# Altium PCB sdc_prech_pcb.PcbDoc
Units mm, origin at the board's own origin, x right, y up, seen from the top; angles counter-clockwise.
Board outline 80 x 80 mm, 2 copper layers (Top Layer, Bottom Layer); 50 components, 36 nets, 153 pads, 18 vias.
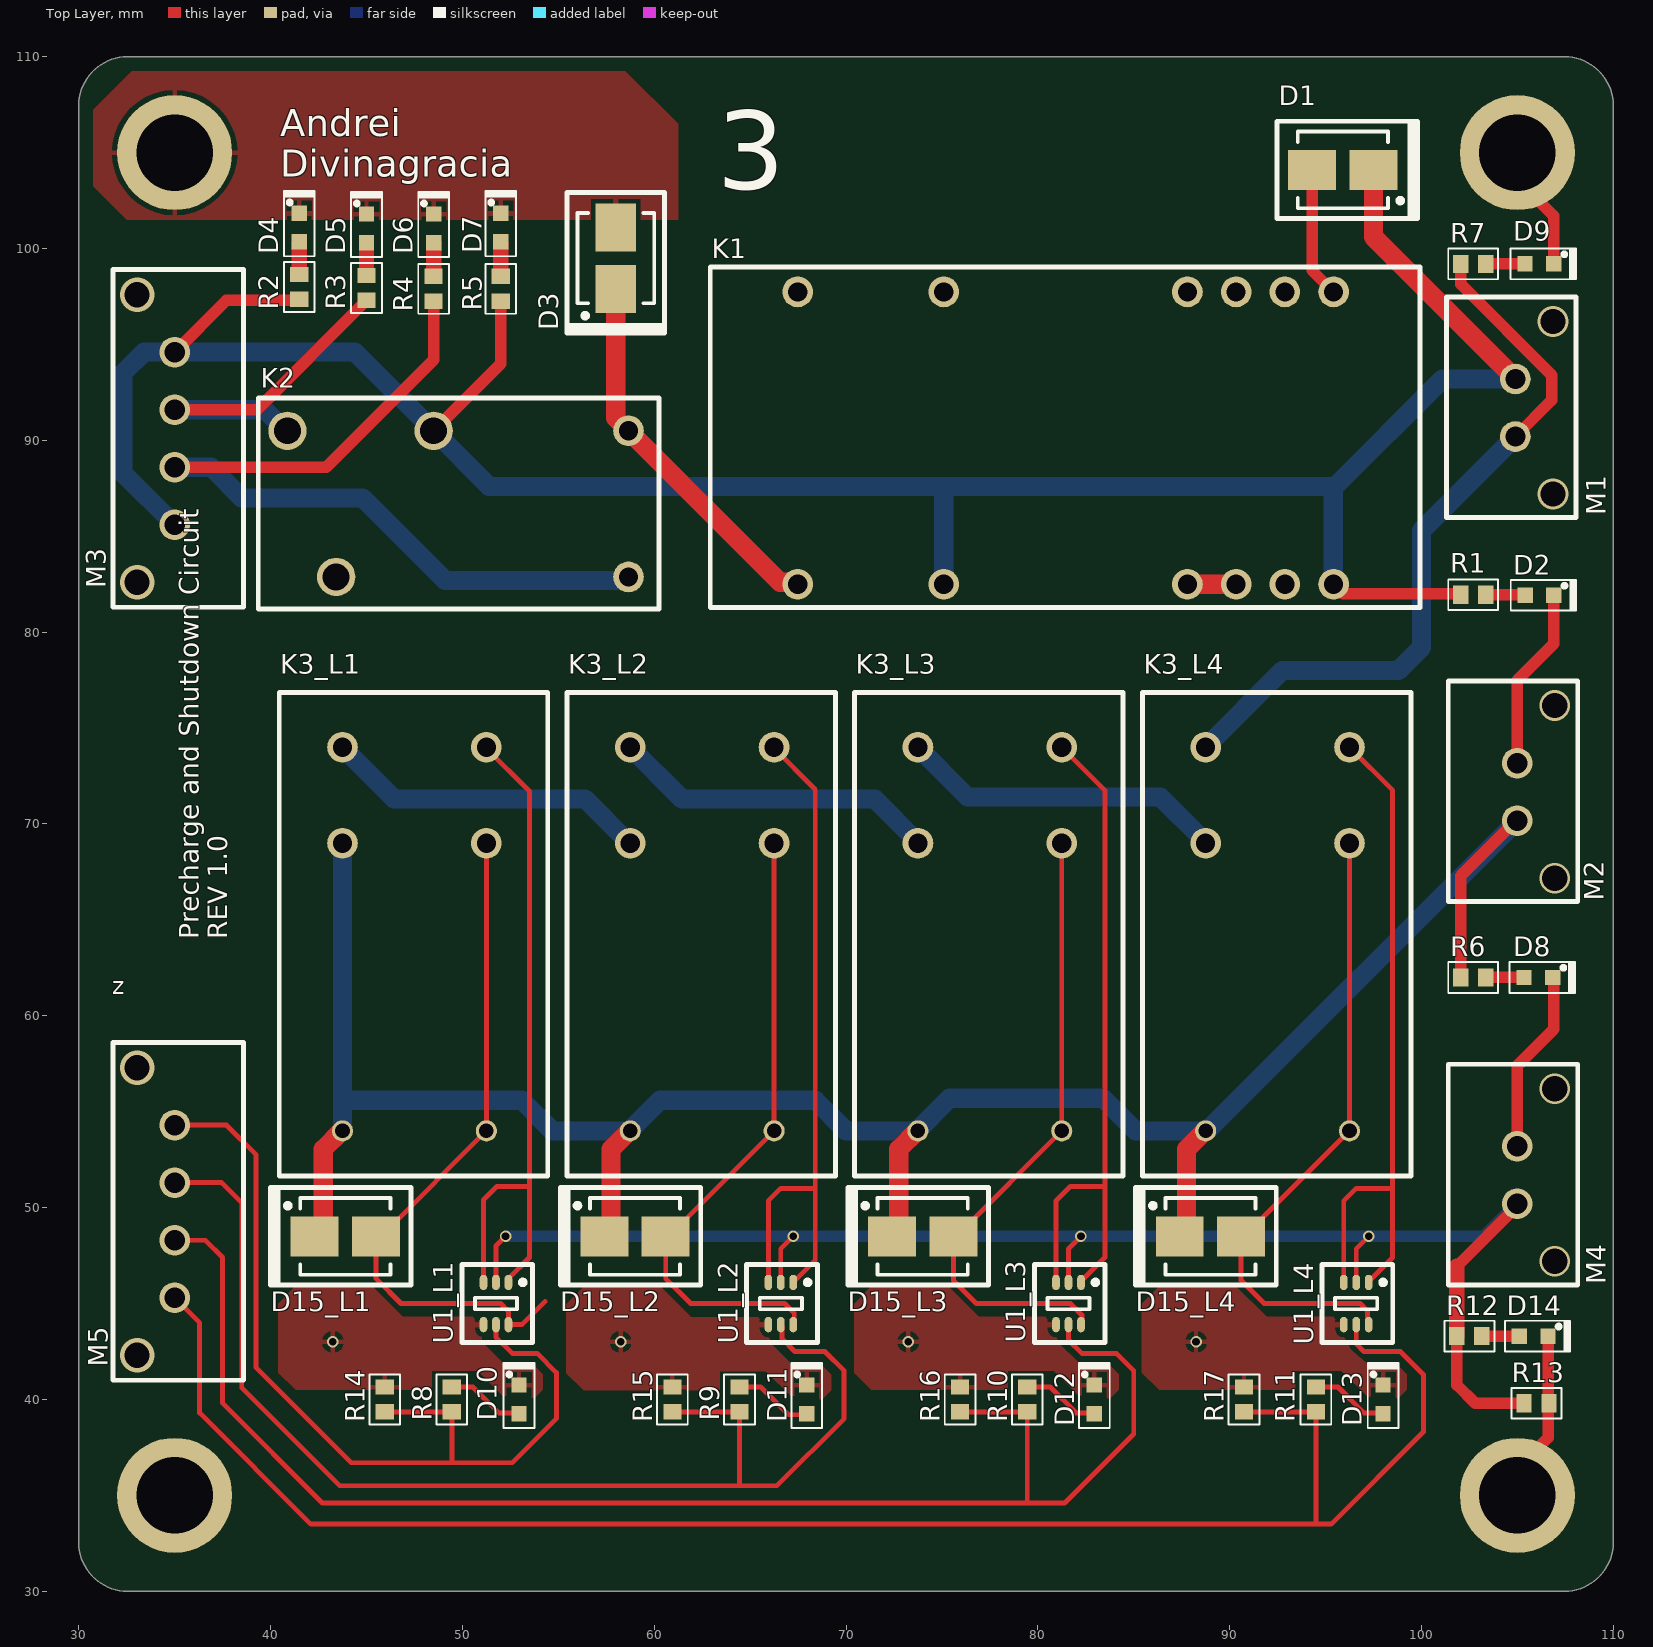
[diagram p0: Top Layer view]
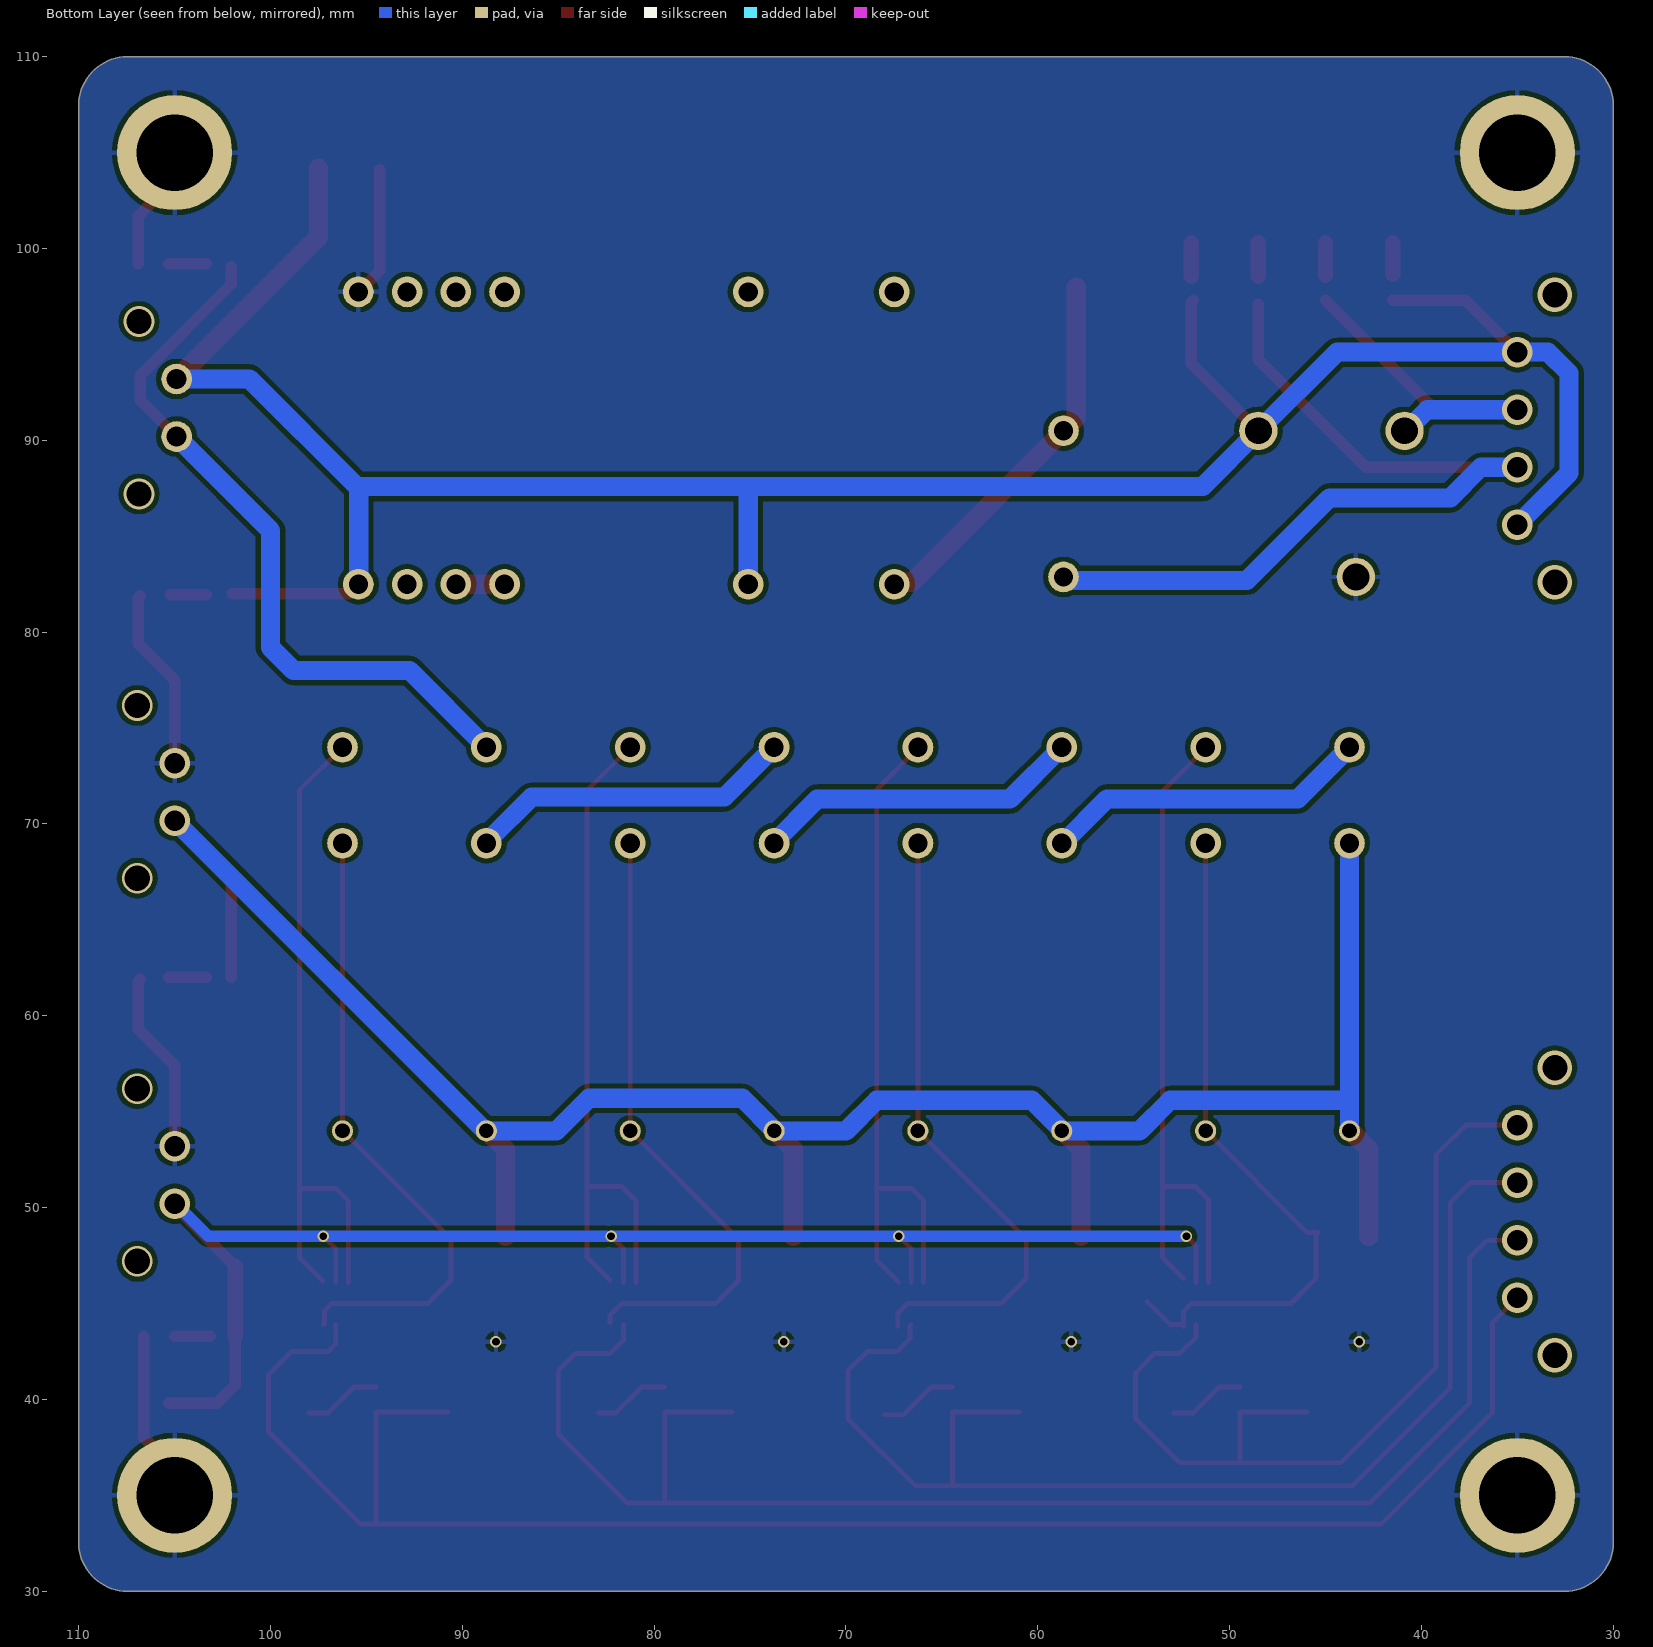
[diagram p1: Bottom Layer view, seen from below]
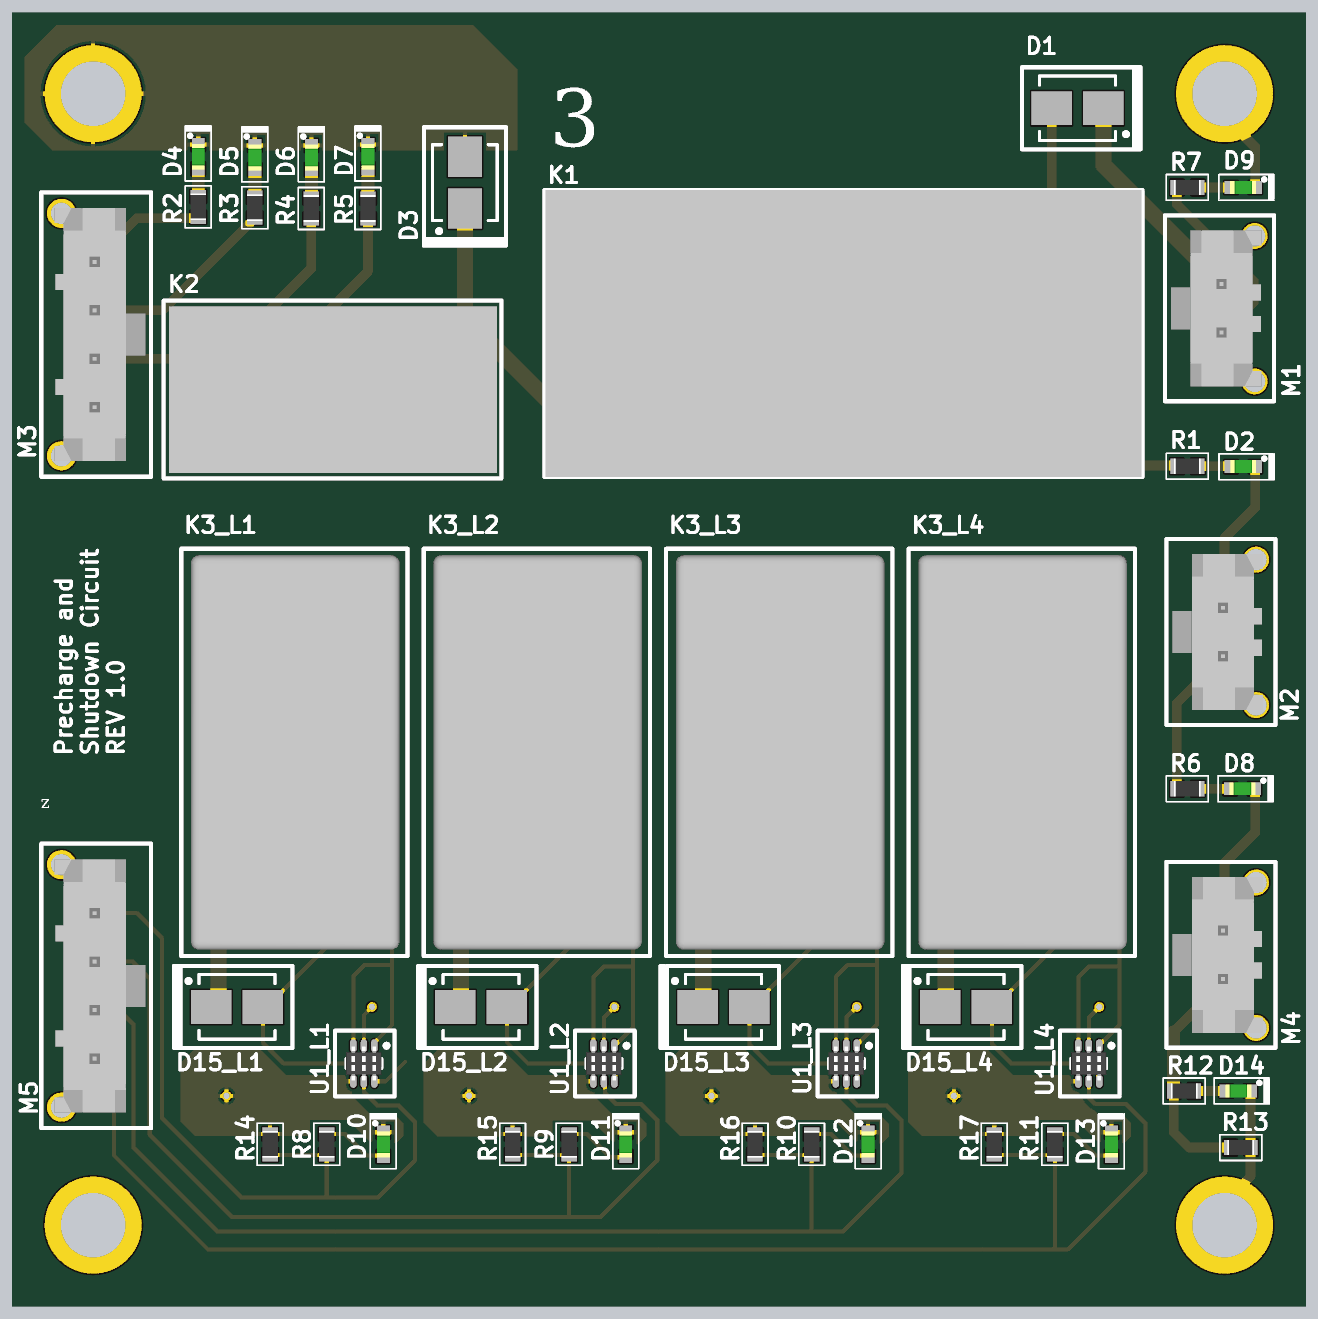
[diagram p2: 3D render of the assembled board from above, using the file's embedded part models]

## Layer stack, top to bottom
Top Solder: solder mask 0.0102, Solder Resist, Dk 3.5
Top Layer: signal copper 0.0356
Dielectric 1: dielectric 0.32, FR-4, Dk 4.8
Bottom Layer: signal copper 0.0356
Bottom Solder: solder mask 0.0102, Solder Resist, Dk 3.5

## Board outline
32.54,30 cw(c32.54,32.54) 30,32.54 30,107.46 cw(c32.54,107.46) 32.54,110 107.46,110 cw(c107.46,107.46) 110,107.46 110,32.54 cw(c107.46,32.54) 107.46,30

## Design rules (kind name [scope] priority, off if disabled: settings)
Clearance [All] p1: gap=0.254 ignorepadtopadclearanceinfootprint=TRUE except(0: Arc-Hole Track-Hole SMDPad-Hole THPad-Hole Via-Hole Fill-Hole Poly-Hole Region-Hole Text-Hole)
PolygonConnect [All] p1: connectstyle=Relief reliefconductorwidth=0.254 reliefentries=4 polygonreliefangle="90 Angle" airgapwidth=0.254
RoutingVias [All] p1: holewidth=0.711 width=1.27 viastyle="Through Hole" minholewidth=0.711 minwidth=1.27 maxholewidth=0.711 maxwidth=1.27
SolderMaskExpansion [All] p1: expansion=0.102
Width [All] p1: maxlimit=1 minlimit=0.1 preferedwidth=0.254 minimp=50.000000 maximp=50.000000 favimp=50.000000
30 further rules are at their usual default settings.

## Classes and differential pairs
channel class Latch: L1 L2 L3 L4
component class U_shutdown_circuit: D8 D9 D10 D11 D12 D13 D14 M4 M5 R6 R7 R8 R9 R10 R11 R12 R13 R14 R15 R16 R17
component class U_precharge_circuit: D1 D2 D3 K1 K2 R1
component class sdc_prech_top_sheet: D4 D5 D6 D7 M1 M2 M3 R2 R3 R4 R5
component class L4: D15_L4 K3_L4 U1_L4
component class L3: D15_L3 K3_L3 U1_L3
component class L2: D15_L2 K3_L2 U1_L2
component class L1: D15_L1 K3_L1 U1_L1

## Components (designator, comment, footprint, x,y, rotation, side; value= is the part's Value field where it differs from the comment)
D1 "SD560BTR" DIODE 95.9,104.1 r180 top
D2 "BLUE" "LED 0603" 106.157,81.925 r0 top
D3 "SD560BTR" DIODE 58,99.5 r90 top
D4 "BLUE" "LED 0603" 41.5,101.1 r90 top
D5 "BLUE" "LED 0603" 45,101.05 r90 top
D6 "BLUE" "LED 0603" 48.5,101.05 r90 top
D7 "BLUE" "LED 0603" 52,101.1 r90 top
D8 "BLUE" "LED 0603" 106.1,62 r0 top
D9 "BLUE" "LED 0603" 106.15,99.2 r0 top
D10 "YELLOW" "LED 0603" 52.95,40 r90 top
D11 "YELLOW" "LED 0603" 67.95,40 r90 top
D12 "YELLOW" "LED 0603" 82.95,40 r90 top
D13 "YELLOW" "LED 0603" 98,40 r90 top
D14 "YELLOW" "LED 0603" 105.85,43.3 r0 top
D15_L1 "SD560BTR" DIODE 43.9,48.5 r0 top (schematic designator D15)
D15_L2 "SD560BTR" DIODE 59,48.5 r0 top (schematic designator D15)
D15_L3 "SD560BTR" DIODE 74,48.5 r0 top (schematic designator D15)
D15_L4 "SD560BTR" DIODE 89,48.5 r0 top (schematic designator D15)
K1 "Time Delay Relay" "RELAY TIMED" 99.87,99.04 r180 top
K2 "G5Q-14-DC12" "RELAY SPDT PRECHARGE" 58.66,90.5 r180 top
K3_L1 "5-1419124-6" "RELAY DPST SDC" 53.95,52.05 r90 top (schematic designator K3)
K3_L2 "5-1419124-6" "RELAY DPST SDC" 68.95,52.05 r90 top (schematic designator K3)
K3_L3 "5-1419124-6" "RELAY DPST SDC" 83.95,52.05 r90 top (schematic designator K3)
K3_L4 "5-1419124-6" "RELAY DPST SDC" 98.95,52.05 r90 top (schematic designator K3)
M1 "0436500228" "2-PIN MOLEX" 104.81,91.725 r90 top
M2 "0436500228" "2-PIN MOLEX" 104.9,71.7 r90 top
M3 "0436500428" "4-PIN MOLEX" 35.09,90.1 r270 top
M4 "0436500228" "2-PIN MOLEX" 104.9,51.725 r90 top
M5 "0436500428" "4-PIN MOLEX" 35.09,49.8 r270 top
R1 "1KΩ" "RESISTOR CRCW0603" 102.7,81.95 r0 top
R2 "1KΩ" "RESISTOR CRCW0603" 41.5,98 r90 top
R3 "1KΩ" "RESISTOR CRCW0603" 45,97.95 r90 top
R4 "1KΩ" "RESISTOR CRCW0603" 48.5,97.9 r90 top
R5 "1KΩ" "RESISTOR CRCW0603" 52,97.9 r90 top
R6 "1KΩ" "RESISTOR CRCW0603" 102.7,62 r0 top
R7 "1KΩ" "RESISTOR CRCW0603" 102.7,99.2 r0 top
R8 "1KΩ" "RESISTOR CRCW0603" 49.45,40 r90 top
R9 "1KΩ" "RESISTOR CRCW0603" 64.45,40 r90 top
R10 "1KΩ" "RESISTOR CRCW0603" 79.45,40 r90 top
R11 "1KΩ" "RESISTOR CRCW0603" 94.5,40 r90 top
R12 "1KΩ" "RESISTOR CRCW0603" 102.5,43.3 r0 top
R13 "10KΩ" "RESISTOR CRCW0603" 106,39.8 r0 top
R14 "10KΩ" "RESISTOR CRCW0603" 45.95,40 r90 top
R15 "10KΩ" "RESISTOR CRCW0603" 60.95,40 r90 top
R16 "10KΩ" "RESISTOR CRCW0603" 75.95,40 r90 top
R17 "10KΩ" "RESISTOR CRCW0603" 90.75,40 r90 top
U1_L1 "SSM6N7002CFU,LF" "N-MOSFET (2 FETS)" 51.75,45 r270 top (schematic designator U1)
U1_L2 "SSM6N7002CFU,LF" "N-MOSFET (2 FETS)" 66.6,45 r270 top (schematic designator U1)
U1_L3 "SSM6N7002CFU,LF" "N-MOSFET (2 FETS)" 81.6,45 r270 top (schematic designator U1)
U1_L4 "SSM6N7002CFU,LF" "N-MOSFET (2 FETS)" 96.6,45 r270 top (schematic designator U1)

## Footprints (in the part's own frame and the unit in brackets; to place one, negate y for a bottom-side part, rotate by r counter-clockwise, add the part's x,y. Pads: shape width x height; smd on the part's side, far side on the other; paste and mask are expansions set on the pad)
"2-PIN MOLEX" [mm]
  round 1.6 hole 1.06: 1(-1.525,-0.09) 2(1.475,-0.09)
  silkscreen extent -5.75,-3.25 5.75,3.5, body extent -4.82,-2.47 4.83,3.14, height 9.95
"4-PIN MOLEX" [mm]
  round 1.6 hole 1.06: 1(-4.5,-0.09) 2(-1.5,-0.09) 3(1.5,-0.09) 4(4.5,-0.09)
  silkscreen extent -8.8,-3.3 8.8,3.5, body extent -7.82,-2.47 7.83,3.14, height 9.95
DIODE [mm] "Molded Diode, 2-Leads, Body 4.38x3.62mm, IPC Medium Density"
  rect 2.5x2.1 smd: 1(1.6,0) 2(-1.6,0)
  silkscreen extent -3.9,-2.54 3.43,2.54, body extent -2.35,-1.97 2.35,1.97, height 2.6
"LED 0603" [mm]
  rect 0.8x0.8 smd: 1(-0.75,0) 2(0.75,0)
  silkscreen extent -1.5,-0.8 1.9,0.8, body extent -0.8,-0.4 0.8,0.4, height 0.39
"N-MOSFET (2 FETS)" [mm] "TSOP, 6-Leads, Body 2.00x1.25mm, Pitch 0.65mm, IPC Medium Density"
  oval 0.8x0.4 smd: 1(-1.1,0.65) 2(-1.1,0) 3(-1.1,-0.65) 4(1.1,-0.65) 5(1.1,0) 6(1.1,0.65)
  silkscreen extent -2.03,-1.78 2.03,1.91, body extent -1.05,-1.1 1.05,1.1, height 1.1
"RELAY DPST SDC" [mm]
  round 1.1 hole 0.762: 1(1.95,2.7) 6(1.95,10.2)
  round 1.6 hole 1: 2(16.95,2.7) 3(21.95,2.7) 4(21.95,10.2) 5(16.95,10.2)
  silkscreen extent -0.4,-0.5 24.8,13.5, body extent 0,0 24.4,12.9, height 24.51
"RELAY SPDT PRECHARGE" [mm]
  round 1.6 hole 1: 1(0,0) 3(0,7.62)
  round 2 hole 1.4: 2(10.16,0) 4(17.78,0) 5(15.24,7.62)
  silkscreen extent -1.6,-1.7 19.3,9.3, body extent -1.33,-1.34 18.97,8.96, height 15.81
"RELAY TIMED" [mm]
  round 1.6 hole 1: 1(4.45,1.3) 2(6.99,1.3) 3(9.53,1.3) 4(12.07,1.3) 9(24.77,1.3) 12(32.39,1.3) 13(32.39,16.54) 15(24.77,16.54) 21(12.07,16.54) 22(9.53,16.54) 23(6.99,16.54) 24(4.45,16.54)
  silkscreen extent -0.05,0 36.95,17.75, body extent 0,0 36.9,17.75, height 20.5
"RESISTOR CRCW0603" [mm] "Chip Resistor, 2-Leads, Body 1.58x0.85mm, IPC Medium Density"
  rect 0.8x0.95 smd: 1(-0.65,0) 2(0.65,0)
  silkscreen extent -1.3,-0.8 1.3,0.8, body extent -0.82,-0.48 0.82,0.48, height 0.5

## Part data
D1 D3 D15_L1 D15_L2 D15_L3 D15_L4: "DIODE GEN PURP 600V 5A SMB", Average Rectified Current=5A, Case/Package=SMB, Manufacturer=SMC, Max Reverse Voltage (DC)=600V, Supplier Part Number 1=1655-1530-6-ND, Category="Discrete Semiconductor Products", ComponentLink1Description=http://www.smc-diodes.com/propdf/SD560B%20N1412%20REV.D.pdf?src-supplier=Digi-Key, ComponentLink1URL=http://www.smc-diodes.com/propdf/SD560B%20N1412%20REV.D.pdf?src-supplier=Digi-Key, Manufacturer Part Number=SD560BTR, Mount="Surface Mount", Packaging="Tape and Reel", Pricing 1="1=0.42, 10=0.309, 100=0.1468, 500=0.11978, 1000=0.08887 (USD)", Stock 1=90144, Supplier 1=Digi-Key
D2 D4 D5 D6 D7 D8 D9: library part LTST-C191TBKT-5A, "LED BLUE CLEAR CHIP SMD", Case/Package=0603, Case Code (Metric)=1608, Color=Blue, Forward Current=20mA, Forward Voltage=2.8V, Lens Color=Colorless, Manufacturer="Vishay Lite-On", Max Operating Temperature=80°C, Min Operating Temperature=-20°C, Package Quantity=5000, Supplier Part Number 1=160-2212-6-ND, Test Current=5mA, Voltage=29V, Case Code (Imperial)=0603, Category=Optoelectronics, ComponentLink1Description=http://optoelectronics.liteon.com/upload/download/DS22-2003-020/LTST-C191TBKT-5A.pdf?src-supplier=Digi-Key, ComponentLink1URL=http://optoelectronics.liteon.com/upload/download/DS22-2003-020/LTST-C191TBKT-5A.pdf?src-supplier=Digi-Key, ComponentLink2Description=http://components.arrow.com/part/dataview/52218576S9813001N1331?src-supplier=Arrow, ComponentLink2URL=http://components.arrow.com/part/dataview/52218576S9813001N1331?src-supplier=Arrow, ComponentLink3Description=http://optoelectronics.liteon.com/zh-cn/api/DwonloadFileHandler.ashx?txtSpecNo=DS22-2003-020&txtPartNo=LTST-C191TBKT-5A&src-supplier=Avnet, ComponentLink3URL=http://optoelectronics.liteon.com/zh-cn/api/DwonloadFileHandler.ashx?txtSpecNo=DS22-2003-020&txtPartNo=LTST-C191TBKT-5A&src-supplier=Avnet, ComponentLink4Description=http://www.mouser.com/ds/2/239/LTST-C191TBKT-5A-1150649.pdf?src-supplier=Mouser, ComponentLink4URL=http://www.mouser.com/ds/2/239/LTST-C191TBKT-5A-1150649.pdf?src-supplier=Mouser, Dominant Wavelength=473nm, Height=0.55mm, Illumination Color=Blue, Length=1.6mm, Lens Style=Diffused,Colorless,Rectangular, Lens Transparency=Clear, Luminous Intensity=15mcd, Manufacturer Part Number=LTST-C191TBKT-5A, Mount="Surface Mount", Number of LEDs=1, Number of Pins=2, Packaging="Tape and Reel", Pricing 1="1=0.5, 10=0.359, 100=0.1596, 500=0.11172, 1000=0.09177, 2500=0.0798 (USD)", Radiation Hardening=No, Stock 1=9654, Supplier 1=Digi-Key, Viewing Angle=130°, Width=0.8mm
D10 D11 D12 D13 D14: library part LTST-C191KSKT, "LED YELLOW CLEAR SMD", Case/Package=0603, Case Code (Metric)=1608, Color=Yellow, Forward Current=30mA, Forward Voltage=2.4V, Lens Color=Colorless, Manufacturer="Vishay Lite-On", Max Operating Temperature=85°C, Min Operating Temperature=-55°C, Package Quantity=1, Power Dissipation=75mW, Reverse Voltage=5V, Supplier Part Number 1=160-1448-6-ND, Test Current=20mA, Case Code (Imperial)=0603, Category=Optoelectronics, ComponentLink1Description=http://optoelectronics.liteon.com/upload/download/DS22-2000-224/LTST-C191KSKT.PDF?src-supplier=Digi-Key, ComponentLink1URL=http://optoelectronics.liteon.com/upload/download/DS22-2000-224/LTST-C191KSKT.PDF?src-supplier=Digi-Key, ComponentLink2Description=https://www.verical.com/server-webapp/html/getDatasheet?partID=141495&src-supplier=Verical, ComponentLink2URL=https://www.verical.com/server-webapp/html/getDatasheet?partID=141495&src-supplier=Verical, ComponentLink3Description=http://www.mouser.com/ds/2/239/LTST-C191KSKT-1141271.pdf?src-supplier=Mouser, ComponentLink3URL=http://www.mouser.com/ds/2/239/LTST-C191KSKT-1141271.pdf?src-supplier=Mouser, ComponentLink4Description=http://www1.futureelectronics.com/doc/LITE%20ON/LITE-ON%20LTST-C191KSKT.pdf?src-supplier=Future+Electronics, ComponentLink4URL=http://www1.futureelectronics.com/doc/LITE%20ON/LITE-ON%20LTST-C191KSKT.pdf?src-supplier=Future+Electronics, Depth=0.8mm, Dominant Wavelength=597nm, Height=0.55mm, Illumination Color=Yellow, Lead Free="Lead Free", Length=1.6mm, Lens Style=Diffused,Colorless,Rectangular,Clear, Lens Transparency=Clear, Luminous Intensity=180mcd, Manufacturer Part Number=LTST-C191KSKT, Mount="Surface Mount", Number of Elements=1, Number of LEDs=1, Number of Pins=2, Packaging="Tape and Reel", Power Rating=75mW, Pricing 1="1=0.29, 10=0.215, 100=0.1016, 500=0.06774, 1000=0.05306, 2500=0.05194 (USD)", Radiation Hardening=No, Stock 1=464545, Supplier 1=Digi-Key, Viewing Angle=130°, Wavelength=588nm, Width=0.8mm
K1: library part H3FA-A-DC12, "Time Delay & Timing Relays 12VDC 1s-10m Contact SPST-NO+SPST-NC", Manufacturer=Omron, Package Quantity=1, Supplier Part Number 1=Z6344-ND, Category="Industrial Automation and Controls", ComponentLink1Description=http://www.mouser.com/ds/2/307/-794852.pdf?src-supplier=Mouser, ComponentLink1URL=http://www.mouser.com/ds/2/307/-794852.pdf?src-supplier=Mouser, ComponentLink2Description=http://www.ia.omron.com/data_pdf/cat/h3fa_ds_e_7_2_csm89.pdf?src-supplier=Digi-Key, ComponentLink2URL=http://www.ia.omron.com/data_pdf/cat/h3fa_ds_e_7_2_csm89.pdf?src-supplier=Digi-Key, Manufacturer Part Number=H3FA-A-DC12, Mount="Through Hole", Pricing 1="1=79, 10=74.844, 25=70.686, 50=66.528, 100=62.37 (USD)", Relay Type=Integrated, Stock 1=0, Supplier 1=Digi-Key, Termination="PC Pin", Throw Configuration=SPST,DPST
K2: "Electromechanical Relay SPDT 5(NO)/3(NC)ADC/10(NO)/3(NC)AAC 12VDC 360Ohm Through Hole", Coil Current=33.3mA, Coil Power=400mW, Coil Resistance=360R, Coil Voltage (DC)=12V, Contact Current Rating=10A, Manufacturer=Omron, Max Operating Temperature=85°C, Max Voltage Rating (AC)=277V, Max Voltage Rating (DC)=30V, Min Operating Temperature=-40°C, Package Quantity=400, Supplier Part Number 1=Z225-ND, Category=Relays, Coil Type=Non-Latching, ComponentLink1Description=http://www.mouser.com/ds/2/307/en-g5q-22333.pdf?src-supplier=Mouser, ComponentLink1URL=http://www.mouser.com/ds/2/307/en-g5q-22333.pdf?src-supplier=Mouser, Contact Material=Silver, Current Rating=10A, Depth=10.3mm, Height=15.8mm, Lead Free="Lead Free", Length=20.3mm, Manufacturer Part Number=G5Q-14-DC12, Mount="Through Hole", Number of Pins=5, Operate Time=10ms, Packaging=Bulk, Power Consumption=400mW, Pricing 1="1=1.43, 10=1.344, 25=1.1948, 50=1.1348, 100=1.0751, 250=0.95568, 500=0.89596, 1000=0.83622, 5000=0.80636 (USD)", Radiation Hardening=No, Relay Type="General Purpose", Release Time=5ms, Stock 1=53890, Supplier 1=Digi-Key, Termination="PC Pin", Throw Configuration=SPDT, Voltage Rating (AC)=277V, Weight=6.5g, Width=10.3mm
K3_L1 K3_L2 K3_L3 K3_L4: "General Purpose Relay, Osa Series, Power, Non Latching, Dpst-No, 12 Vdc, 3 A Rohs Compliant: Yes", Coil Current=45mA, Coil Power=600mW, Coil Resistance=270R, Coil Voltage (DC)=12V, Contact Current Rating=3A, Contact Voltage Rating (AC)=240V, Manufacturer="TE Connectivity", Max Operating Temperature=60°C, Min Operating Temperature=-30°C, Package Quantity=1000, Supplier Part Number 1=OSA-SS-212DM3,000-ND, Category=Relays, Coil Type=Non-Latching, ComponentLink1Description=http://www.farnell.com/datasheets/1652820.pdf?src-supplier=Farnell, ComponentLink1URL=http://www.farnell.com/datasheets/1652820.pdf?src-supplier=Farnell, ComponentLink2Description=http://www.farnell.com/cad/1652820.pdf?src-supplier=Element14, ComponentLink2URL=http://www.farnell.com/cad/1652820.pdf?src-supplier=Element14, ComponentLink3Description=http://www.te.com/commerce/DocumentDelivery/DDEController?Action=srchrtrv&DocNm=5-1419124-6&DocType=Customer+Drawing&DocLang=English&src-supplier=Digi-Key, ComponentLink3URL=http://www.te.com/commerce/DocumentDelivery/DDEController?Action=srchrtrv&DocNm=5-1419124-6&DocType=Customer+Drawing&DocLang=English&src-supplier=Digi-Key, Contact Material=Silver, ELV=Compliant, Height=0.976inch, Length=24.4mm, Manufacturer Part Number=5-1419124-6, Mount="Through Hole", Operate Time=20ms, Packaging=Box, Pricing 1="1=2.54, 10=2.385, 25=2.1204, 50=2.0142, 100=1.9083, 250=1.69624, 500=1.59022, 1000=1.48421, 5000=1.4312 (USD)", REACH SVHC=Unknown, Relay Type="General Purpose", Release Time=10ms, Stock 1=2593, Supplier 1=Digi-Key, Termination=PCB, Throw Configuration=DPST, Weight=13g, Width=12.9mm
M1 M2 M4: "Conn Power HDR 2 POS 3mm Solder ST Thru-Hole 2 Terminal 1 Port Micro-Fit 3.0™ Tray", Color=Black, Manufacturer=Molex, Max Operating Temperature=105°C, Min Operating Temperature=-40°C, Package Quantity=3264, Supplier Part Number 1=WM10658-ND, Category="Connectors, Interconnects", ComponentLink1Description=http://www.molex.com/pdm_docs/sd/436500228_sd.pdf?src-supplier=Digi-Key, ComponentLink1URL=http://www.molex.com/pdm_docs/sd/436500228_sd.pdf?src-supplier=Digi-Key, ComponentLink2Description=http://components.arrow.com/part/dataview/2942358S8703676N3303?src-supplier=Arrow, ComponentLink2URL=http://components.arrow.com/part/dataview/2942358S8703676N3303?src-supplier=Arrow, Connector Type="Male Pin", Contact Material=Brass, Contact Plating=Gold, Depth=5.57mm, Fastening Type=Ramp, Housing Material=Polymer, Length=9.65mm, Manufacturer Part Number=0436500228, Mount="Through Hole", Number of Contacts=2, Number of Ports=1, Number of Positions=2, Number of Rows=1, Number of Terminals=2, Orientation=Straight, Packaging=Tray, Pitch=3mm, Pricing 1="1=0.9, 10=0.795, 100=0.6857, 500=0.56106, 1000=0.49872, 5000=0.43638, 10000=0.41456 (USD)", Stock 1=9247, Supplier 1=Digi-Key, Termination=Solder
M3 M5: "Conn Power HDR 4 POS 3mm Solder ST Thru-Hole 4 Terminal 1 Port Micro-Fit 3.0™ Tray", Color=Black, Manufacturer=Molex, Max Operating Temperature=105°C, Min Operating Temperature=-40°C, Package Quantity=2040, Supplier Part Number 1=WM10669-ND, Category="Connectors, Interconnects", ComponentLink1Description=http://www.molex.com/pdm_docs/sd/436500428_sd.pdf?src-supplier=Digi-Key, ComponentLink1URL=http://www.molex.com/pdm_docs/sd/436500428_sd.pdf?src-supplier=Digi-Key, ComponentLink2Description=http://www.molex.com/webdocs/datasheets/pdf/en-us/0436500428_PCB_HEADERS.pdf?src-supplier=Avnet, ComponentLink2URL=http://www.molex.com/webdocs/datasheets/pdf/en-us/0436500428_PCB_HEADERS.pdf?src-supplier=Avnet, Connector Type="Male Pin", Contact Material=Brass, Contact Plating=Gold, Depth=5.57mm, Fastening Type=Ramp, Housing Material=Polymer, Length=15.65mm, Manufacturer Part Number=0436500428, Mount="Through Hole", Number of Contacts=4, Number of Ports=1, Number of Positions=4, Number of Rows=1, Number of Terminals=4, Orientation=Straight, Packaging=Tray, Pitch=3mm, Pricing 1="1=1.44, 10=1.265, 100=1.0916, 500=0.89316, 1000=0.79392, 5000=0.69468, 10000=0.65995 (USD)", Stock 1=1193, Supplier 1=Digi-Key, Termination=Solder
R1 R2 R3 R4 R5 R6 R7 R8 R9 R10 R11 R12: library part CRCW06031K00FKEA, "RES SMD 1K OHM 1% 1/10W 0603", Case/Package=0603, Case Code (Metric)=1608, Manufacturer="Vishay Dale", Max Operating Temperature=155°C, Max Power Dissipation=100mW, Min Operating Temperature=-55°C, Package Quantity=10, Resistance=1kR, Supplier Part Number 1=541-1.00KHCT-ND, Temperature Coefficient=100ppm/°C, Tolerance=1%, Voltage Rating=75V, Case Code (Imperial)=0603, Category=Resistors, ComponentLink1Description=http://www.vishay.com/docs/20035/dcrcwe3.pdf?src-supplier=Digi-Key, ComponentLink1URL=http://www.vishay.com/docs/20035/dcrcwe3.pdf?src-supplier=Digi-Key, ComponentLink2Description=http://uk.rs-online.com/webdocs/0d98/0900766b80d98afc.pdf?src-supplier=RSComponents, ComponentLink2URL=http://uk.rs-online.com/webdocs/0d98/0900766b80d98afc.pdf?src-supplier=RSComponents, ComponentLink3Description=http://www.vishay.com/docs/20035/dcrcwe3.pdf?src-supplier=Avnet, ComponentLink3URL=http://www.vishay.com/docs/20035/dcrcwe3.pdf?src-supplier=Avnet, ComponentLink4Description=http://www.vishay.com/docs/20035/dcrcwe3.pdf?src-supplier=Avnet+Asia, ComponentLink4URL=http://www.vishay.com/docs/20035/dcrcwe3.pdf?src-supplier=Avnet+Asia, ComponentLink5Description=http://www.farnell.com/datasheets/2310790.pdf?src-supplier=Element14, ComponentLink5URL=http://www.farnell.com/datasheets/2310790.pdf?src-supplier=Element14, ComponentLink6Description=https://www.distrelec.biz/Web/Downloads/a_/en/flD-CRCW-e3_data_en.pdf?mime=application%2Fpdf&src-supplier=Distrelec, ComponentLink6URL=https://www.distrelec.biz/Web/Downloads/a_/en/flD-CRCW-e3_data_en.pdf?mime=application%2Fpdf&src-supplier=Distrelec, ComponentLink7Description=http://www.vishay.com/docs/20035/dcrcwe3.pdf?src-supplier=Future+Electronics, ComponentLink7URL=http://www.vishay.com/docs/20035/dcrcwe3.pdf?src-supplier=Future+Electronics, ComponentLink8Description=http://www.vishay.com/docs/20035/dcrcwe3.pdf?src-supplier=Avnet+Europe, ComponentLink8URL=http://www.vishay.com/docs/20035/dcrcwe3.pdf?src-supplier=Avnet+Europe, Composition="Thick Film", Contact Plating=Tin, Depth=0.85mm, Features="Automotive AEC-Q200", Height=0.45mm, Lead Free="Lead Free", Length=1.55mm, Manufacturer Part Number=CRCW06031K00FKEA, Military Standard=Not, Mount="Surface Mount", Number of Pins=2, Number of Terminations=2, Packaging="Tape and Reel", Power Rating=100mW, Pricing 1="1=0.1, 10=0.034, 100=0.0139, 1000=0.00623, 2500=0.0054 (USD)", Radiation Hardening=No, REACH SVHC=Unknown, Stock 1=1811474, Supplier 1=Digi-Key, Termination=SMD/SMT, Voltage Rating (DC)=75V, Weight=7.1E-05oz, Width=0.033inch
R13 R14 R15 R16 R17: library part CRCW060310K0FKEA, "RES SMD 10K OHM 1% 1/10W 0603", Case/Package=0603, Case Code (Metric)=1608, Manufacturer=Vishay, Max Operating Temperature=155°C, Max Power Dissipation=100mW, Min Operating Temperature=-55°C, Package Quantity=10, Resistance=10kR, Supplier Part Number 1=541-10.0KHCT-ND, Temperature Coefficient=100ppm/°C, Tolerance=1%, Voltage Rating=75V, Case Code (Imperial)=0603, Category=Resistors, ComponentLink1Description=http://www.vishay.com/docs/20008/dcrcw.pdf?src-supplier=Avnet+Europe, ComponentLink1URL=http://www.vishay.com/docs/20008/dcrcw.pdf?src-supplier=Avnet+Europe, ComponentLink2Description=https://www.verical.com/server-webapp/html/getDatasheet?partID=86831&src-supplier=Verical, ComponentLink2URL=https://www.verical.com/server-webapp/html/getDatasheet?partID=86831&src-supplier=Verical, ComponentLink3Description=http://www.farnell.com/datasheets/2310790.pdf?src-supplier=Allied+Electronics, ComponentLink3URL=http://www.farnell.com/datasheets/2310790.pdf?src-supplier=Allied+Electronics, ComponentLink4Description=http://www.vishay.com/docs/20035/dcrcwe3.pdf?src-supplier=Digi-Key, ComponentLink4URL=http://www.vishay.com/docs/20035/dcrcwe3.pdf?src-supplier=Digi-Key, ComponentLink5Description=http://www.farnell.com/datasheets/2310790.pdf?src-supplier=Mouser, ComponentLink5URL=http://www.farnell.com/datasheets/2310790.pdf?src-supplier=Mouser, ComponentLink6Description=http://www.farnell.com/datasheets/2310790.pdf?src-supplier=Element14, ComponentLink6URL=http://www.farnell.com/datasheets/2310790.pdf?src-supplier=Element14, ComponentLink7Description=http://www.farnell.com/datasheets/2310790.pdf?src-supplier=Avnet, ComponentLink7URL=http://www.farnell.com/datasheets/2310790.pdf?src-supplier=Avnet, ComponentLink8Description=http://www.vishay.com/docs/20035/dcrcwe3.pdf?src-supplier=Future+Electronics, ComponentLink8URL=http://www.vishay.com/docs/20035/dcrcwe3.pdf?src-supplier=Future+Electronics, ComponentLink9Description=http://uk.rs-online.com/webdocs/0d98/0900766b80d98afc.pdf?src-supplier=RSComponents, ComponentLink9URL=http://uk.rs-online.com/webdocs/0d98/0900766b80d98afc.pdf?src-supplier=RSComponents, ComponentLink10Description=http://www.farnell.com/datasheets/2310790.pdf?src-supplier=Distrelec, ComponentLink10URL=http://www.farnell.com/datasheets/2310790.pdf?src-supplier=Distrelec, Composition="Thick Film", Contact Plating=Tin,Lead, Depth=0.85mm, Features="Automotive AEC-Q200", Height=0.45mm, Lead Free="Lead Free", Length=1.55mm, Manufacturer Part Number=CRCW060310K0FKEA, Military Standard=Not, Number of Pins=2, Number of Terminations=2, Packaging="Tape and Reel", Power Rating=100mW, Pricing 1="1=0.1, 10=0.034, 100=0.0139, 1000=0.00623, 2500=0.0054 (USD)", Radiation Hardening=No, REACH SVHC=Unknown, Stock 1=1434373, Supplier 1=Digi-Key, Termination=SMD/SMT, Voltage Rating (DC)=75V, Weight=7.1E-05oz, Width=0.033inch
U1_L1 U1_L2 U1_L3 U1_L4: "MOSFET 2N-CH 60V 0.17A US6", Case/Package=SOT-363, Continuous Drain Current (ID)=170mA, Drain to Source Voltage (Vdss)=60V, Input Capacitance=17pF, Manufacturer=Toshiba, Max Power Dissipation=285mW, Supplier Part Number 1=SSM6N7002CFULFDKR-ND, Category="Discrete Semiconductor Products", ComponentLink1Description=https://toshiba.semicon-storage.com/info/docget.jsp?did=29875&prodName=SSM6N7002CFU&src-supplier=Digi-Key, ComponentLink1URL=https://toshiba.semicon-storage.com/info/docget.jsp?did=29875&prodName=SSM6N7002CFU&src-supplier=Digi-Key, ComponentLink2Description=http://www.mouser.com/ds/2/408/SSM6N7002CFU_datasheet_en_20150413-736631.pdf?src-supplier=Mouser, ComponentLink2URL=http://www.mouser.com/ds/2/408/SSM6N7002CFU_datasheet_en_20150413-736631.pdf?src-supplier=Mouser, FET Type="2 N-Channel", Manufacturer Part Number=SSM6N7002CFU,LF, Mount="Surface Mount", Packaging="Tape and Reel", Pricing 1="1=0.27, 10=0.221, 100=0.0906, 500=0.0756, 1000=0.05253 (USD)", Rds On Max=3.9R, Stock 1=13946, Supplier 1=Digi-Key

## Free pads (board coordinates)
  round 6 hole 4: ""(35,35) ""(35,105) ""(105,35) ""(105,105)

## Via types
v1: diameter 0.6, hole 0.4, Top Layer to Bottom Layer, 8 vias
v2: diameter 1.6, hole 1.32, Top Layer to Bottom Layer, 6 vias
v3: diameter 1.8, hole 1.32, Top Layer to Bottom Layer, 4 vias

## Nets (pads, with @x,y where several pads share a name; then routed paths per layer and width w, separated by ;. In a path a pad name is that pad's centre, name@x,y a point inside that pad or via, vN(x,y) a via of type N, cw(c..) or ccw(c..) an arc to the next point about the centre after c; other vN are vias at no path point)
"BMS Fault": M5.3 R10.1 R16.1 U1_L3.5 | length 78.1
  Top Layer w0.254: M5.3 36.6,48.3 37.5,47.4 37.5,39.8 42.7,34.6 79.4,34.6 ; R16.1 R10.1 79.45,34.65 79.4,34.6 ; U1_L3.5 81.6,43.1 82.3,42.4 84.1,42.4 85,41.5 85,38.2 81.4,34.6 79.4,34.6
"BSPD Fault": M5.1 R8.1 R14.1 U1_L1.5 | length 47.8
  Top Layer w0.254: M5.1 37.7,54.3 39.25,52.75 39.25,41.65 44.2,36.7 49.5,36.7 ; R14.1 R8.1 49.45,36.75 49.5,36.7 ; U1_L1.5 51.75,43.25 52.6,42.4 53.9,42.4 54.9,41.4 54.9,39 52.6,36.7 49.5,36.7
COIL+_L1: D15_L1.2 D15_L2.2 D15_L3.2 D15_L4.2 K3_L1.5 K3_L1.6 K3_L2.6 K3_L3.6 K3_L4.6 M2.1 R6.1 | length 119.5
  Top Layer w0.6: R6.1 102.05,67.3 M2.1@105,70.25
  Top Layer w1: D15_L1.2@42.75,48.5 42.75,53.05 K3_L1.6@43.7,54 ; D15_L2.2@57.75,48.5 57.75,53.05 K3_L2.6@58.7,54 ; D15_L3.2@72.75,48.5 72.75,53.05 K3_L3.6@73.7,54 ; D15_L4.2@87.75,48.5 87.75,53.05 K3_L4.6@88.7,54
  Bottom Layer w1: K3_L1.6 K3_L1.5 ; 43.8,55.6 53.1,55.6 54.7,54 K3_L2.6@58.7,54 ; K3_L2.6 K3_L2.6@58.7,54 ; K3_L3.6 K3_L3.6@73.7,54 ; K3_L4.6@88.7,54 88.815,54 M2.1 ; K3_L4.6 85.1,54 83.4,55.7 75.4,55.7 K3_L3.6@73.7,54 ; K3_L2.6@58.7,54 60.3,55.6 68.4,55.6 70,54 K3_L3.6@73.7,54
COIL-_L1: D15_L1.1 K3_L1.1 K3_L1.2 U1_L1.6 | length 36.1
  Top Layer w0.254: D15_L1.1@45.4,48.7 45.95,48.7 K3_L1.1 51.25,68.95 K3_L1.2@51.2,69 ; D15_L1.1 45.5,46.3 46.8,45 50.5,45 52,45 52.4,44.6 U1_L1.6@52.4,43.8 ; U1_L1.6 53.1,43.9 54.3,45.1
COIL-_L2: D15_L2.1 K3_L2.1 K3_L2.2 U1_L2.6 | length 33
  Top Layer w0.254: D15_L2.1 60.6,46.3 61.9,45 66.8,45 67.3,44.5 U1_L2.6@67.3,43.8 ; D15_L2.1@60.9,48.7 60.95,48.7 K3_L2.1 ; K3_L2.2 K3_L2.1 ; K3_L2.1@66.3,53.9 66.25,53.95 K3_L2.1
COIL-_L3: D15_L3.1 K3_L3.1 K3_L3.2 U1_L3.6 | length 32.8
  Top Layer w0.254: D15_L3.1 75.6,46.2 76.8,45 81.7,45 82.3,44.4 U1_L3.6@82.3,44 ; D15_L3.1@75.9,48.6 75.9,48.65 K3_L3.1 ; K3_L3.1@81.2,54 81.25,54.05 K3_L3.2
COIL-_L4: D15_L4.1 K3_L4.1 K3_L4.2 U1_L4.6 | length 33.3
  Top Layer w0.254: D15_L4.1@90.6,48.3 90.6,46.2 91.8,45 96.812,45 97.181,44.631 97.181,43.969 U1_L4.6 ; D15_L4.1@90.7,48.6 90.85,48.6 K3_L4.1 ; D15_L4.1@90.95,48.5 D15_L4.1@91.2,48.5 ; K3_L4.2 96.25,54.25 K3_L4.1@96.3,54.2 ; K3_L4.1@96.3,53.6 K3_L4.1@96.3,54
GND: D1.1 D2.2 D3.1 D4.2 D5.2 D6.2 D7.2 D8.2 D9.2 D10.2 D11.2 D12.2 D13.2 D14.2 K1.1 K2.5 M2.2 M4.2 pad. R13.2 R14.2 R15.2 R16.2 R17.2 U1_L1.4 U1_L2.4 U1_L3.4 U1_L4.4 | length 37.4
  Top Layer w0.254: pad.@106.6,37.2 pad.@106.7,37.1
  Top Layer w0.6: D1.1 94.3,98.86 K1.1 ; M4.2 104.99,57.39 106.9,59.3 106.9,61.8 D8.2@106.8,61.9 ; M2.2 104.99,77.49 106.9,79.4 106.9,81.8 D2.2@106.8,81.9 ; pad.@105.2,36.6 106.6,38 D14.2 ; pad.@105.8,102.8 106.9,101.7 D9.2
  other v1: 43.25,43 58.25,43 73.25,43 88.25,43
"HV+ AIR": K2.3 M3.3 R4.1 | length 44.8
  Top Layer w0.6: M3.3 42.9,88.6 48.5,94.2 R4.1@48.5,97.1
  Bottom Layer w1: M3.3 36.9,88.6 38.5,87 44.8,87 49.1,82.7 K2.3@58.6,82.7
"IMD Fault": M5.2 R9.1 R15.1 U1_L2.5 | length 63.1
  Top Layer w0.254: M5.2 37.45,51.3 38.5,50.25 38.5,40.6 43.6,35.5 64.4,35.5 ; R15.1 64.35,39.35 R9.1@64.4,39.3 ; R9.1 64.45,35.55 64.4,35.5 ; U1_L2.5 66.669,43.831 66.669,43.169 67.338,42.5 68.9,42.5 69.9,41.5 69.9,39 66.4,35.5 64.4,35.5
"LATCH PATH_L1": K3_L1.3 U1_L1.1 U1_L1.3 | length 36
  Top Layer w0.254: U1_L1.3 51.1,50.4 51.8,51.1 53.4,51.1 ; K3_L1.3@51.2,74 53.5,71.7 53.5,47.4 U1_L1.1@52.4,46.3
"LATCH PATH_L2": K3_L2.3 U1_L2.1 U1_L2.3 | length 36.2
  Top Layer w0.254: U1_L2.3 65.95,50.35 66.6,51 68.3,51 ; K3_L2.3@66.2,74 68.4,71.8 68.4,47.25 U1_L2.1
"LATCH PATH_L3": K3_L3.3 U1_L3.1 U1_L3.3 | length 36.2
  Top Layer w0.254: U1_L3.3 80.95,50.35 81.7,51.1 83.4,51.1 ; K3_L3.3 83.5,71.75 83.5,47.4 U1_L3.1@82.3,46.2
"LATCH PATH_L4": K3_L4.3 U1_L4.1 U1_L4.3 | length 36.3
  Top Layer w0.254: U1_L4.3 95.95,50.35 96.6,51 98.5,51 ; K3_L4.3 98.5,71.75 98.5,51 ; U1_L4.1@97.3,46.2 98.5,47.4 98.5,51
NetD2_1: D2.1 R1.2 | length 1.9
  Top Layer w0.254: D2.1@105.2,81.95 D2.1@105.25,82
  Top Layer w0.6: R1.2 D2.1@105.2,81.95
NetD3_2: D3.2 K1.13 K2.1 | length 19.7
  Top Layer w1: D3.2@58,98 D3.2 58,91.16 K2.1 66.56,82.6 K1.13@67.3,82.6
NetD4_1: D4.1 R2.2 | length 1.7
  Top Layer w0.8: R2.2 D4.1@41.5,100.3
NetD5_1: D5.1 R3.2 | length 1.7
  Top Layer w0.8: R3.2 D5.1
NetD6_1: D6.1 R4.2 | length 1.8
  Top Layer w0.8: R4.2 D6.1
NetD7_1: D7.1 R5.2 | length 1.8
  Top Layer w0.8: R5.2 D7.1@52,100.3
NetD8_1: D8.1 R6.2 | length 2
  Top Layer w0.6: R6.2 D8.1@105.3,62
NetD9_1: D9.1 R7.2 | length 2
  Top Layer w0.6: R7.2 D9.1@105.3,99.2
NetD10_1: D10.1 R8.2 | length 4
  Top Layer w0.254: R8.2 50.55,40.65 51.9,39.3 D10.1@52.9,39.3
NetD11_1: D11.1 R9.2 | length 4.2
  Top Layer w0.254: R9.2 65.55,40.65 67,39.2 D11.1@68,39.2
NetD12_1: D12.1 R10.2 | length 4
  Top Layer w0.254: R10.2 80.65,40.65 82,39.3 D12.1@82.9,39.3
NetD13_1: D13.1 R11.2 | length 4.1
  Top Layer w0.254: R11.2 95.65,40.65 97,39.3 D13.1@98,39.3
NetD14_1: D14.1 R12.2 | length 2
  Top Layer w0.254: D14.1@105,43.3 D14.1@105.1,43.4
  Top Layer w0.6: R12.2 D14.1@105,43.3
NetK1_21: K1.21 K1.22 | length 2.5
  Top Layer w1: K1.21 K1.22@90.3,82.5
"Precharge AIR": K2.4 M3.2 R3.1 | length 18.8
  Top Layer w0.6: M3.2 39.3,91.6 R3.1
  Bottom Layer w1: M3.2 39.7,91.6 K2.4@40.9,90.4
"PRECHARGE START": D1.2 K1.15 K1.24 K2.2 M1.2 M3.1 M3.4 R1.1 R2.1 R5.1 | length 134.2
  Top Layer w0.254: K1.24 K1.24@95.92,82
  Top Layer w0.6: M3.1 37.7,97.3 R2.1@41.5,97.3 ; K2.2 52,94 52,97.2 R5.1@51.9,97.3 ; K1.24@95.92,82 R1.1@102,82
  Top Layer w1: D1.2@97.5,104.2 D1.2 97.5,100.6 M1.2
  Bottom Layer w1: M3.4 32.3,88.3 32.3,93.5 33.4,94.6 M3.1 44.4,94.6 K2.2 51.4,87.6 75.2,87.6 ; K1.15 75.1,87.5 75.2,87.6 ; 95.3,87.6 75.2,87.6 ; K1.24@95.4,82.4 95.4,87.5 101.1,93.2 M1.2
"RELAY L1/L2": K3_L1.4 K3_L2.5 | length 17
  Bottom Layer w1: K3_L1.4 46.45,71.3 56.4,71.3 K3_L2.5@58.7,69
"RELAY L2/L3": K3_L2.4 K3_L3.5 | length 17.1
  Bottom Layer w1: K3_L2.4 61.45,71.3 71.5,71.3 K3_L3.5@73.8,69
"RELAY L3/L4": K3_L3.4 K3_L4.5 | length 16.8
  Bottom Layer w1: K3_L3.4 76.35,71.4 86.4,71.4 K3_L4.5@88.6,69.2
"SDC END": K3_L4.4 M1.1 R7.1 | length 38.2
  Top Layer w0.254: R7.1@102.05,99.05 R7.1
  Top Layer w0.6: R7.1@102.05,99.05 102.05,98.15 106.8,93.4 106.8,92.1 M1.1
  Bottom Layer w1: K3_L4.4 92.75,78 98.8,78 100,79.2 100,85.3 M1.1
SET/RESET: M4.1 R12.1 R13.1 U1_L1.2 U1_L2.2 U1_L3.2 U1_L4.2 | length 78.5
  Top Layer w0.254: U1_L1.2 51.75,48 v1(52.25,48.5) ; U1_L2.2 66.6,47.85 v1(67.25,48.5) ; U1_L3.2 81.6,47.85 v1(82.25,48.5) ; U1_L4.2 96.6,47.85 v1(97.25,48.5)
  Top Layer w0.6: R12.1 101.85,40.75 102.8,39.8 R13.1@105.3,39.8 ; 101.85,46.95 M4.1@105,50.1
  Top Layer w0.8: R12.1 101.85,46.95
  Bottom Layer w0.254: v1(82.25,48.5) v1@82.5,48.5
  Bottom Layer w0.6: v1@52.3,48.5 v1(67.25,48.5) v1(82.25,48.5) ; v1@82.5,48.5 v1(97.25,48.5) 103.25,48.5 M4.1@105,50.25
"VCU Fault": M5.4 R11.1 R17.1 U1_L4.5 | length 92.5
  Top Layer w0.254: M5.4 36.3,44 36.3,39.3 42.1,33.5 94.4,33.5 ; R17.1 R11.1 94.5,33.6 94.4,33.5 ; U1_L4.5 96.6,42.9 97,42.5 98.9,42.5 100.1,41.3 100.1,38.3 95.3,33.5 94.4,33.5
pads on no net: K1.2 K1.3 K1.4 K1.9 K1.12 K1.23
copper on no net:
  other v2: 106.95,47.2 106.95,56.2 106.95,67.175 106.95,76.175 106.86,87.2 106.86,96.2
  other v3: 33.04,42.3 33.04,57.3 33.04,82.6 33.04,97.6

## Polygon pours and split planes (outlines as drawn)
GND on Bottom Layer "Bottom Layer-GND" (solid, pour order 4): 32.54,30 cw(c32.54,32.54) 30,32.54 30,107.46 cw(c32.54,107.46) 32.54,110 107.46,110 cw(c107.46,107.46) 110,107.46 110,32.54 cw(c107.46,32.54) 107.46,30
GND on Top Layer "Top Layer-GND" (solid, pour order 42): 61.25,101.5 61.25,106.5 58.5,109.25 32.75,109.25 30.75,107.25 30.75,103.25 32.5,101.5
GND on Top Layer "Top Layer-GND 2" (solid, pour order 40): 93.425,40.5 86.325,40.5 85.425,41.4 85.425,45 86.425,46 90.225,46 91.925,44.3 96.025,44.3 96.025,43 97.125,41.9 98.625,41.9 99.225,41.3 99.225,40.5 98.725,40 97.325,40 95.825,41.5 93.425,41.5
GND on Top Layer "Top Layer-GND 2" (solid, pour order 36): 78.425,40.5 71.325,40.5 70.425,41.4 70.425,45 71.425,46 75.225,46 76.925,44.3 81.025,44.3 81.025,43 82.125,41.9 83.625,41.9 84.225,41.3 84.225,40.5 83.725,40 82.325,40 80.825,41.5 78.425,41.5
GND on Top Layer "Top Layer-GND 2" (solid, pour order 34): 63.425,40.475 56.325,40.475 55.425,41.375 55.425,44.975 56.425,45.975 60.225,45.975 61.925,44.275 66.025,44.275 66.025,42.975 67.125,41.875 68.625,41.875 69.225,41.275 69.225,40.475 68.725,39.975 67.325,39.975 65.825,41.475 63.425,41.475
GND on Top Layer "Top Layer-GND 2" (solid, pour order 16): 48.4,40.5 41.3,40.5 40.4,41.4 40.4,45 41.4,46 45.2,46 46.9,44.3 51,44.3 51,43 52.1,41.9 53.6,41.9 54.2,41.3 54.2,40.5 53.7,40 52.3,40 50.8,41.5 48.4,41.5
GND on Top Layer "Top Layer-GND 3" (solid, pour order 14): 63.2,38.1

## Silkscreen, mask and mechanical layers (free items; w line width, h text height)
Top Overlay:
  text "Andrei / Divinagracia" at 40.5,103.75 h1.4
  text "3" at 63.25,101.75 h7
  text "Precharge and Shutdown Circuit / REV 1.0" at 37.75,64 h1 r90
  text "z" at 31.75,60.8 h1.52